# EAGLE board CT_schematic (EAGLE 7.6.0)

Size 100 x 80 mm. Coordinates in mm from the lower left corner, seen from the top.
Outline: 0,0 100,0 100,80 0,80 0,0
Copper layers (1*16): Top 0.035mm / dielectric 1.5mm / Bottom 0.035mm
Design rules "default": minimum track width 10mil, minimum drill 24mil, track to track 8mil, track to pad 8mil, pad to pad 8mil, via to via 8mil, smd to smd 8mil, copper to edge 40mil, drill to drill 8mil, minimum pad ring 10mil, minimum via ring 8mil, stop-mask expansion 4mil, vias tented up to drill 0mil, thermal gap 10mil

## Footprints (pad centres in the part's own frame; a part is rotated, then mirrored left to right if it is on the bottom)
C0603 = smd 0.8 x 0.8: 1 -0.762,0; 2 0.762,0
C0402 = smd 0.5 x 0.5: 1 -0.508,0; 2 0.508,0
C0805 = smd 1.2 x 1.3: 1 -1.016,0; 2 1.016,0
C1206 = smd 1.3 x 1.6: 1 -1.524,0; 2 1.524,0
L0603 = smd 0.8 x 0.8: 1 -0.762,0; 2 0.762,0
WE-HCI_7030/7040/7050 = smd 2.5 x 3: 1 -2.45,0; 2 2.45,0
R0603 = smd 0.8 x 0.8: 1 -0.762,0; 2 0.762,0
LQFP144 = smd 0.35 x 1.35: 1 -8.75,-10.625; 2 -8.25,-10.625; 3 -7.75,-10.625; 4 -7.25,-10.625; 5 -6.75,-10.625; 6 -6.25,-10.625; 7 -5.75,-10.625; 8 -5.25,-10.625; 9 -4.75,-10.625; 10 -4.25,-10.625; 11 -3.75,-10.625; 12 -3.25,-10.625; 13 -2.75,-10.62; 14 -2.25,-10.625; 15 -1.75,-10.625; 16 -1.25,-10.625; 17 -0.75,-10.625; 18 -0.25,-10.625; 19 0.25,-10.625; 20 0.75,-10.625; 21 1.25,-10.625; 22 1.75,-10.625; 23 2.25,-10.625; 24 2.75,-10.62; 25 3.25,-10.625; 26 3.75,-10.625; 27 4.25,-10.625; 28 4.75,-10.625; 29 5.25,-10.625; 30 5.75,-10.625; 31 6.25,-10.625; 32 6.75,-10.625; 33 7.25,-10.625; 34 7.75,-10.625; 35 8.25,-10.625; 36 8.75,-10.625; 73 8.75,10.625; 74 8.25,10.625; 75 7.75,10.625; 76 7.25,10.625; 77 6.75,10.625; 78 6.25,10.625; 79 5.75,10.625; 80 5.25,10.625; 81 4.75,10.625; 82 4.25,10.625; 83 3.75,10.625; 84 3.25,10.625; 85 2.75,10.625; 86 2.25,10.625; 87 1.75,10.625; 88 1.25,10.625; 89 0.75,10.625; 90 0.25,10.625; 91 -0.25,10.625; 92 -0.75,10.625; 93 -1.25,10.625; 94 -1.75,10.625; 95 -2.25,10.625; 96 -2.75,10.625; 97 -3.25,10.625; 98 -3.75,10.625; 99 -4.25,10.625; 100 -4.75,10.625; 101 -5.25,10.625; 102 -5.75,10.625; 103 -6.25,10.625; 104 -6.75,10.625; 105 -7.25,10.625; 106 -7.75,10.625; 107 -8.25,10.625; 108 -8.75,10.625 | smd 1.35 x 0.35: 37 10.625,-8.75; 38 10.625,-8.25; 39 10.625,-7.75; 40 10.625,-7.25; 41 10.625,-6.75; 42 10.625,-6.25; 43 10.625,-5.75; 44 10.625,-5.25; 45 10.625,-4.75; 46 10.625,-4.25; 47 10.625,-3.75; 48 10.625,-3.25; 49 10.625,-2.75; 50 10.625,-2.25; 51 10.625,-1.75; 52 10.625,-1.25; 53 10.625,-0.75; 54 10.625,-0.25; 55 10.625,0.25; 56 10.625,0.75; 57 10.625,1.25; 58 10.625,1.75; 59 10.625,2.25; 60 10.625,2.75; 61 10.625,3.25; 62 10.625,3.75; 63 10.625,4.25; 64 10.625,4.75; 65 10.625,5.25; 66 10.625,5.75; 67 10.625,6.25; 68 10.625,6.75; 69 10.625,7.25; 70 10.625,7.75; 71 10.625,8.25; 72 10.625,8.75; 109 -10.625,8.75; 110 -10.625,8.25; 111 -10.625,7.75; 112 -10.625,7.25; 113 -10.625,6.75; 114 -10.625,6.25; 115 -10.625,5.75; 116 -10.625,5.25; 117 -10.625,4.75; 118 -10.625,4.25; 119 -10.625,3.75; 120 -10.625,3.25; 121 -10.625,2.75; 122 -10.625,2.25; 123 -10.625,1.75; 124 -10.625,1.25; 125 -10.625,0.75; 126 -10.625,0.25; 127 -10.625,-0.25; 128 -10.625,-0.75; 129 -10.625,-1.25; 130 -10.625,-1.75; 131 -10.625,-2.25; 132 -10.625,-2.75; 133 -10.625,-3.25; 134 -10.625,-3.75; 135 -10.625,-4.25; 136 -10.625,-4.75; 137 -10.625,-5.25; 138 -10.625,-5.75; 139 -10.625,-6.25; 140 -10.625,-6.75; 141 -10.625,-7.25; 142 -10.625,-7.75; 143 -10.625,-8.25; 144 -10.625,-8.75
TH58NVG3S0HBAI4 = smd 0.46 x 0.46: A1 -5.6,2.4; A2 -5.6,1.6; A9 -5.6,-5.6; A10 -5.6,-6.4; B1 -4.8,2.4; B9 -4.8,-5.6; B10 -4.8,-6.4; C3 -4,0.8; C4 -3.2,0.8; C5 -2.4,0.8; C6 -1.6,0.8; C7 -0.8,0.8; C8 0,0.8; D3 -4,0; D4 -3.2,0; D5 -2.4,0; D6 -1.6,0; D7 -0.8,0; D8 0,0; E3 -4,-0.8; E4 -3.2,-0.8; E5 -2.4,-0.8; E6 -1.6,-0.8; E7 -0.8,-0.8; E8 0,-0.8; F3 -4,-1.6; F4 -3.2,-1.6; F5 -2.4,-1.6; F6 -1.6,-1.6; F7 -0.8,-1.6; F8 0,-1.6; G3 -4,-2.4; G4 -3.2,-2.4; G5 -2.4,-2.4; G6 -1.6,-2.4; G7 -0.8,-2.4; G8 0,-2.4; H3 -4,-3.2; H4 -3.2,-3.2; H5 -2.4,-3.2; H6 -1.6,-3.2; H7 -0.8,-3.2; H8 0,-3.2; J3 -4,-4; J4 -3.2,-4; J5 -2.4,-4; J6 -1.6,-4; J7 -0.8,-4; J8 0,-4; K3 -4,-4.8; K4 -3.2,-4.8; K5 -2.4,-4.8; K6 -1.6,-4.8; K7 -0.8,-4.8; K8 0,-4.8; L1 0.8,2.4; L2 0.8,1.6; L9 0.8,-5.6; L10 0.8,-6.4; M1 1.6,2.4; M2 1.6,1.6; M9 1.6,-5.6; M10 1.6,-6.4
ABLS-25.000MHZ-B2F-T = smd 5.6 x 2.8: 1 -3.81,0; 2 5.69,0
ASEK = smd 1.4 x 1: 1 -1.1,-0.8; 2 1.1,-0.8; 3 1.1,0.8; 4 -1.1,0.8
TSOT-23-5 = smd 1.3 x 0.62: 1 -1.31,0.95; 2 -1.31,0; 3 -1.31,-0.95; 4 1.31,-0.95; 5 1.31,0.95
DFN8_2X3MC = smd 0.813 x 0.305: 1 -1.398,0.75; 2 -1.398,0.25; 3 -1.398,-0.25; 4 -1.398,-0.75; 5 1.398,-0.75; 6 1.398,-0.25; 7 1.398,0.25; 8 1.398,0.75 | smd 1.753 x 1.549: 9 0,0
JST-2-SMD = smd 1 x 4.6: 1 -1,-3.7; 2 1,-3.7 | smd 1.6 x 3.4: NC1 -3.4,1.5; NC2 3.4,1.5
FCI_10118193-0001LF = smd 0.4 x 1.35: 1 -1.3,2.675; 2 -0.65,2.675; 3 0,2.675; 4 0.65,2.675; 5 1.3,2.675 | smd 1.6 x 1.4: 6 -3.2,2.45; 7 3.2,2.45 | smd 1.9 x 1.9: 8 -1.2,0; 9 1.2,0 | hole 0.5: -3.3,0; 3.3,0
SON-6 = smd 0.55 x 0.3: 1 -0.355,0.5 | smd 0.52 x 0.3: 2 -0.37,0; 3 -0.37,-0.5; 4 0.37,-0.5; 5 0.37,0; 6 0.37,0.5
SW_4-1437565-2 = smd 1.4 x 2.1: 1 -2.23,4.55; 2 -2.23,-4.55; 3 2.23,4.55; 4 2.23,-4.55
LGM67K-G1J2-24-Z = smd 0.8 x 1.4: A -2,0; C 0,0
NC7SZ125M5X = smd 1.3 x 0.7: 1 -1.3,0.95; 2 -1.3,0; 3 -1.3,-0.95; 4 1.3,-0.95; 5 1.3,0.95
DUMMY_PACKAGE_128 = drill 0.3: 1 0,-1; 2 1.5,-1; 3 3,-1

## Placement (x,y rotation side)
C1  1e-06  [C0603]  -22.86,57.15 0 top  (outside the outline)
C2  1e-07  [C0603]  -26.67,57.15 0 top  (outside the outline)
C3  1e-07  [C0603]  -30.48,57.15 0 top  (outside the outline)
C4  1e-07  [C0603]  -34.29,57.15 0 top  (outside the outline)
C5  1e-07  [C0603]  -38.1,57.15 0 top  (outside the outline)
C6  1e-07  [C0603]  -41.91,57.15 0 top  (outside the outline)
C7  1e-07  [C0603]  -45.72,57.15 0 top  (outside the outline)
C8  4.7e-06  [C0603]  -19.05,57.15 0 top  (outside the outline)
C9  1e-07  [C0603]  -49.53,57.15 0 top  (outside the outline)
C10  1e-07  [C0603]  -53.34,57.15 0 top  (outside the outline)
C11  1e-07  [C0603]  -57.15,57.15 0 top  (outside the outline)
C12  1e-07  [C0603]  -60.96,57.15 0 top  (outside the outline)
C13  1e-07  [C0603]  -15.24,62.23 0 top  (outside the outline)
C14  1e-07  [C0603]  -19.05,62.23 0 top  (outside the outline)
C15  1e-08  [C0603]  -22.86,62.23 0 top  (outside the outline)
C16  1e-08  [C0603]  -26.67,62.23 0 top  (outside the outline)
C17  1e-06  [C0603]  -30.48,62.23 0 top  (outside the outline)
C18  1e-11  [C0402]  -53.34,62.23 0 top  (outside the outline)
C19  1e-11  [C0402]  -57.15,62.23 0 top  (outside the outline)
C20  1e-05  [C0805]  -34.29,45.72 0 top  (outside the outline)
C21  1e-07  [C0402]  -60.96,62.23 0 top  (outside the outline)
C22  1e-07  [C0402]  -64.77,62.23 0 top  (outside the outline)
C23  1e-08  [C0402]  -15.24,67.31 0 top  (outside the outline)
C24  1e-05  [C0805]  -39.37,45.72 0 top  (outside the outline)
C25  1e-05  [C0805]  -44.45,45.72 0 top  (outside the outline)
C26  1e-07  [C0402]  -19.05,67.31 0 top  (outside the outline)
C27  1e-05  [C1206]  -16.51,45.72 0 top  (outside the outline)
C28  1e-05  [C1206]  -22.86,45.72 0 top  (outside the outline)
C29  1e-08  [C0402]  -22.86,67.31 0 top  (outside the outline)
F1  240.0  [L0603]  -34.29,62.23 0 top  (outside the outline)
I1  2e-06  [WE-HCI_7030/7040/7050]  -58.42,6.35 0 top  (outside the outline)
R2  1000.0  [R0603]  -38.1,62.23 0 top  (outside the outline)
R4  4700.0  [R0603]  -41.91,62.23 0 top  (outside the outline)
R5  10000.0  [R0603]  -25.4,52.07 0 top  (outside the outline)
R6  10000.0  [R0603]  -30.48,52.07 0 top  (outside the outline)
R7  10000.0  [R0603]  -35.56,52.07 0 top  (outside the outline)
R8  10000.0  [R0603]  -40.64,52.07 0 top  (outside the outline)
R9  10000.0  [R0603]  -45.72,52.07 0 top  (outside the outline)
R10  10000.0  [R0603]  -50.8,52.07 0 top  (outside the outline)
R11  220000.0  [R0603]  -62.23,45.72 0 top  (outside the outline)
R12  1000000.0  [R0603]  -57.15,45.72 0 top  (outside the outline)
R13  10000.0  [R0603]  -55.88,52.07 0 top  (outside the outline)
R14  10000.0  [R0603]  -60.96,52.07 0 top  (outside the outline)
R15  9100.0  [R0603]  -45.72,62.23 0 top  (outside the outline)
R16  680000.0  [R0603]  -15.24,52.07 0 top  (outside the outline)
R17  120000.0  [R0603]  -20.32,52.07 0 top  (outside the outline)
R18  2000.0  [R0603]  -49.53,62.23 0 top  (outside the outline)
R19  10000.0  [R0603]  -15.24,57.15 0 top  (outside the outline)
U1  stm32f100zct7  [LQFP144]  -24.13,11.43 0 top  (outside the outline)
U2  TH58NVG3S0HBAI4  [TH58NVG3S0HBAI4]  -46.99,10.16 0 top  (outside the outline)
U3  ABLS-25.000MHZ-B2F-T  [ABLS-25.000MHZ-B2F-T]  -45.72,39.37 0 top  (outside the outline)
U4  ASEK-32.768KHz-ECST  [ASEK]  -29.21,39.37 0 top  (outside the outline)
U5  ltc3406es5  [TSOT-23-5]  -49.53,45.72 0 top  (outside the outline)
U6  MCP73831T-2ACI/MC  [DFN8_2X3MC]  -38.1,66.04 0 top  (outside the outline)
U7  S2B-PH-SM4-TB(LF)(SN)  [JST-2-SMD]  -41.91,29.21 0 top  (outside the outline)
U8  10118193-0001LF  [FCI_10118193-0001LF]  -53.34,26.67 0 top  (outside the outline)
U9  TPS3895ADRYR  [SON-6]  -31.75,66.04 0 top  (outside the outline)
U10  4-1437565-2  [SW_4-1437565-2]  -27.94,29.21 0 top  (outside the outline)
U11  Q65110A2395  [LGM67K-G1J2-24-Z]  -57.15,38.1 0 top  (outside the outline)
U12  nc7sz125m5x  [NC7SZ125M5X]  -27.94,45.72 0 top  (outside the outline)
U13  Dummy  [DUMMY_PACKAGE_128]  -29.21,67.31 0 top  (outside the outline)

## Library data of the parts
C1-C29 F1 I1 R2 R4-R19 U1-U13 = circuit_tree

## Nets
CLK_CRYSTAL_U1_23: C18.1 U1.23 U3.1
CLK_CRYSTAL_U1_24: C19.1 U1.24 U3.2
CLK_U1_8: U1.8 U4.3
GND: C1.2 C2.2 C3.2 C4.2 C5.2 C6.2 C7.2 C8.2 C9.2 C10.2 C11.2 C12.2 C13.2 C14.2 C15.2 C16.2 C17.2 C18.2 C19.2 C20.2 C21.2 C22.2 C23.2 C24.2 C25.1 C25.2 C26.2 C27.2 C28.2 C29.2 R2.2 R5.2 R11.2 R15.2 R17.2 R18.2 U1.16 U1.30 U1.31 U1.38 U1.51 U1.61 U1.71 U1.83 U1.94 U1.107 U1.120 U1.130 U1.143 U2.C5 U2.K3 U2.K8 U4.2 U5.2 U6.6 U6.9 U7.2 U8.5 U8.6 U8.7 U8.8 U8.9 U9.2 U11.C U12.1 U12.3 U13.1
INPUT_USBPOWER_5V: C27.1 R19.2 U6.1 U6.2 U8.1
NET_U1_25: R4.1 U1.25 U12.4
NET_U1_33: C15.1 C16.1 C17.1 F1.1 U1.32 U1.33
NET_U1_138: R5.1 U1.138
NET_U1_141: U11.A
NET_U1_142: U10.3 U10.4
NET_U2_C3: R9.1 U2.C3
NET_U2_C6: R6.1 U2.C6
NET_U2_C8: R10.1 U2.C8
NET_U5_1: U5.1
NET_U5_3: I1.1 U5.3
NET_U5_5: R11.1 R12.1 U5.5
NET_U5_ATNET_3: I1.2 R12.2
NET_U6_5: R19.1 U6.5
NET_U6_8: R18.1 U6.8
NET_U9_1: R14.1 R15.1 U9.1
NET_U9_3: R16.2 R17.1 U9.3
NET_U9_4: R13.1 U9.4 U12.2
NET_U10_1: R2.1 U10.1 U10.2
PROC_ADC1_IN0: U1.34 U13.2
PROC_ADC1_IN1: U1.35 U13.3
PROC_FSMC_D0: U1.85 U2.H4
PROC_FSMC_D1: U1.86 U2.J4
PROC_FSMC_D2: U1.114 U2.K4
PROC_FSMC_D3: U1.115 U2.K5
PROC_FSMC_D4: U1.58 U2.K6
PROC_FSMC_D5: U1.59 U2.J7
PROC_FSMC_D6: U1.60 U2.K7
PROC_FSMC_D7: U1.63 U2.J8
PROC_FSMC_NOE: R7.1 U1.118 U2.D4
PROC_FSMC_NWE: R8.1 U1.119 U2.C7
VCC_S1_3V7: C24.1 C28.1 U5.4 U6.3 U6.4 U7.1
VCC_TIER1_3V3: C1.1 C2.1 C3.1 C4.1 C5.1 C6.1 C7.1 C8.1 C9.1 C10.1 C11.1 C12.1 C13.1 C14.1 C20.1 C21.1 C22.1 C23.1 C25.2 C26.1 C29.1 F1.2 I1.2 R4.2 R6.2 R7.2 R8.2 R9.2 R10.2 R12.2 R13.2 R14.2 R16.1 U1.6 U1.17 U1.39 U1.52 U1.62 U1.72 U1.84 U1.95 U1.108 U1.121 U1.131 U1.144 U2.H8 U2.J6 U4.4 U9.6 U12.5

## Tracks (layer width: path | path; a pad name or v marks a point on that pad's centre or on a via)
CLK_CRYSTAL_U1_23  (2 unrouted)
CLK_CRYSTAL_U1_24  (2 unrouted)
CLK_U1_8  (1 unrouted)
GND  (66 unrouted)
INPUT_USBPOWER_5V  (4 unrouted)
NET_U1_25  (2 unrouted)
NET_U1_33  (5 unrouted)
NET_U1_138  (1 unrouted)
NET_U1_142  (1 unrouted)
NET_U2_C3  (1 unrouted)
NET_U2_C6  (1 unrouted)
NET_U2_C8  (1 unrouted)
NET_U5_3  (1 unrouted)
NET_U5_5  (2 unrouted)
NET_U5_ATNET_3  (1 unrouted)
NET_U6_5  (1 unrouted)
NET_U6_8  (1 unrouted)
NET_U9_1  (2 unrouted)
NET_U9_3  (2 unrouted)
NET_U9_4  (2 unrouted)
NET_U10_1  (2 unrouted)
PROC_ADC1_IN0  (1 unrouted)
PROC_ADC1_IN1  (1 unrouted)
PROC_FSMC_D0  (1 unrouted)
PROC_FSMC_D1  (1 unrouted)
PROC_FSMC_D2  (1 unrouted)
PROC_FSMC_D3  (1 unrouted)
PROC_FSMC_D4  (1 unrouted)
PROC_FSMC_D5  (1 unrouted)
PROC_FSMC_D6  (1 unrouted)
PROC_FSMC_D7  (1 unrouted)
PROC_FSMC_NOE  (2 unrouted)
PROC_FSMC_NWE  (2 unrouted)
VCC_S1_3V7  (5 unrouted)
VCC_TIER1_3V3  (49 unrouted)